# Altium PCB console_pcb.PcbDoc (part 2 of 2)
Units mil, origin at the board's own origin, x right, y up, seen from the top; angles counter-clockwise.
Board outline 3400 x 2600 mil, 2 copper layers (Top Layer, Bottom Layer); 190 components, 169 nets, 733 pads, 281 vias.
Unrouted connection lines stored in the file: 81.
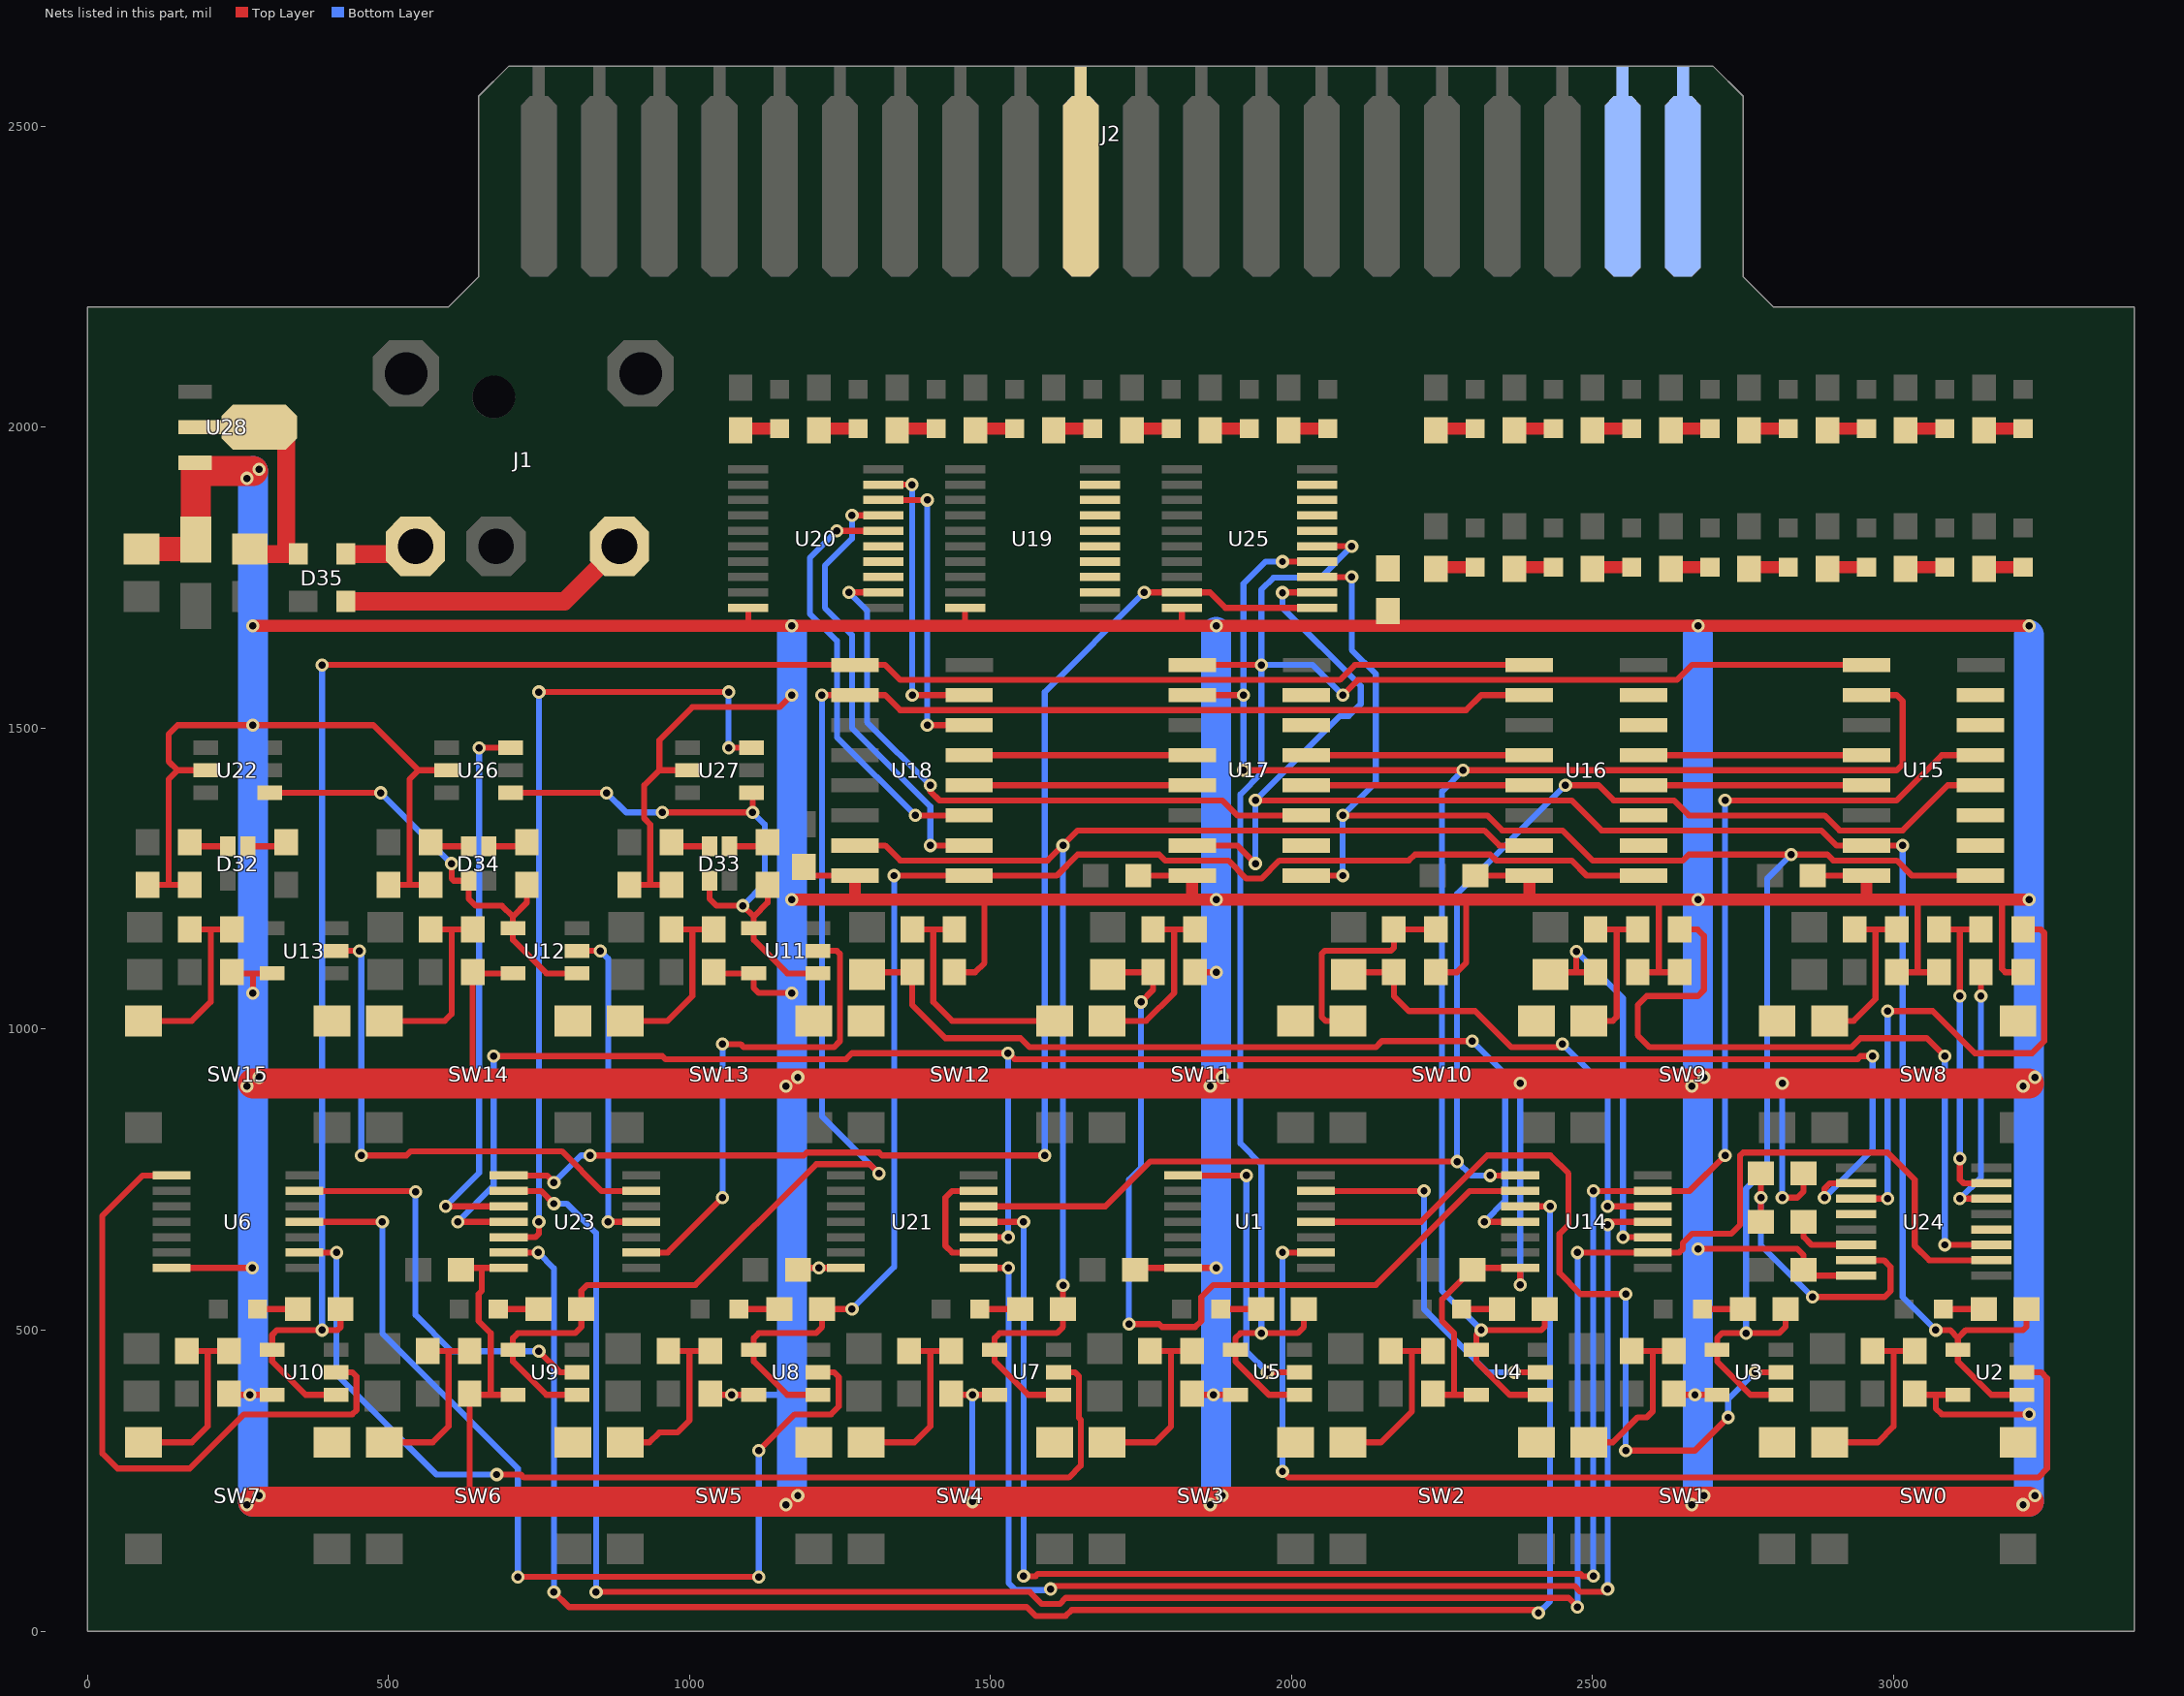
[diagram p2: the nets of this part, all layers, seen from the top]

## Via types
v1: diameter 22, hole 12, Top Layer to Bottom Layer, 281 vias

## Nets (pads, with @x,y where several pads share a name; then routed paths per layer and width w, separated by ;. In a path a pad name is that pad's centre, name@x,y a point inside that pad or via, vN(x,y) a via of type N, cw(c..) or ccw(c..) an arc to the next point about the centre after c; other vN are vias at no path point) (continued)
NetC13_2: C13.2 R37.2 U14.3 | length 656.9
  Top Layer w10: C13.2@2438.94,1094.57 2473,1094.57 ; v1(2473,1129) 2473,1094.57 ; R37.2@2505,1094.57 2473,1094.57 ; v1(2550.59,654.41) U14.3@2600.24,654.41
  Bottom Layer w10: v1(2473,1129) 2550.59,1051.41 v1(2550.59,654.41)
NetC14_2: C14.2 R38.2 U14.5 | length 807.6
  Top Layer w10: C14.2@2095,1094.57 R38.2@2170,1094.57 2170,1055 2195,1030 2305,1030 2365,970 2445,970 v1(2450,975) ; v1(2525,705.59) U14.5@2600.24,705.59
  Bottom Layer w10: v1(2450,975) 2525,900 v1(2525,705.59)
NetC15_2: C15.2 R39.2 U14.9 | length 1445.1
  Top Layer w10: C15.2@1695,1094.57 R39.2@1770,1094.57 1770,1065 v1(1750,1045) ; v1(1730,510) 1780,510 1785,505 1840,505 1850,515 1850,555 1870,575 2140,575 2296.18,731.18 U14.9@2379.76,731.18
  Bottom Layer w10: v1(1730,510) 1730,750 1750,770 v1(1750,1045)
NetC16_2: C16.2 R40.2 U14.11 | length 1489.7
  Top Layer w10: C16.2@1295,1094.57 R40.2@1370,1094.57 1370,1040 1425,985 1550,985 1565,970 2140,970 2150,980 v1(2300,980) ; v1(2320,680) U14.11@2379.76,680
  Bottom Layer w10: v1(2300,980) 2355,925 2355,715 v1(2320,680)
NetC17_1: C17.1 U24.14 | length 128.2
  Top Layer w10: C17.1@2850.43,690 2850.43,654.57 2863.39,641.61 U24.14@2937.8,641.61
NetC17_2: C17.2 R63.2 U24.15 | length 510.9
  Top Layer w10: C17.2@2779.57,690 v1(2779.57,720) R63.2@2779.57,760 ; v1(2865,555) 2985,555 2995,565 2995,605 2983.98,616.02 U24.15@2937.8,616.02
  Bottom Layer w10: v1@2779.57,715.43 v1(2779.57,720) 2779.57,640.43 v1(2865,555)
NetC18_1: C18.1 U24.6 | length 442.9
  Top Layer w10: v1(3110,718.39) U24.6@3162.2,718.39 ; v1(3145,1055) C18.1@3145,1094.57
  Bottom Layer w10: v1(3110,718.39) 3145,753.39 v1(3145,1055)
NetC18_2: C18.2 R64.2 U24.7 | length 540.1
  Top Layer w10: R64.2@3075,1165.43 C18.2@3145,1165.43 ; v1(3110,785) 3110,750 3116.02,743.98 U24.7@3162.2,743.98 ; v1(3110,1055) 3110,1165.43
  Bottom Layer w10: v1(3110,785) v1(3110,1055)
NetC19_1: C19.1 D35.4 U28.2 | length 378.4
  Top Layer w20: U28.2@187.01,2000 U28.2@285.43,2000
  Top Layer w30: C19.1@278,1789.37 D35.4@348,1789.37 ; 330,1790 U28.2@330,2000
NetD0_1: D0.1 R30.2 | length 67.1
  Top Layer w10: D0.1@3082.48,535 R30.2@3149.57,535
NetD1_1: D1.1 R29.2 | length 67.1
  Top Layer w10: D1.1@2682.48,535 R29.2@2749.57,535
NetD2_1: D2.1 R28.2 | length 67.1
  Top Layer w10: D2.1@2282.48,535 R28.2@2349.57,535
NetD3_1: D3.1 R27.2 | length 67.1
  Top Layer w10: D3.1@1882.48,535 R27.2@1949.57,535
NetD4_1: D4.1 R26.2 | length 67.1
  Top Layer w10: D4.1@1482.48,535 R26.2@1549.57,535
NetD5_1: D5.1 R25.2 | length 67.1
  Top Layer w10: D5.1@1082.48,535 R25.2@1149.57,535
NetD6_1: D6.1 R24.2 | length 67.1
  Top Layer w10: D6.1@682.48,535 R24.2@749.57,535
NetD7_1: D7.1 R23.2 | length 67.1
  Top Layer w10: D7.1@282.48,535 R23.2@349.57,535
NetD8_1: D8.1 R73.2 | length 62
  Top Layer w20: R73.2@3152.95,1767.52 D8.1@3215,1767.52
NetD9_1: D9.1 R71.2 | length 62
  Top Layer w20: R71.2@3022.95,1767.52 D9.1@3085,1767.52
NetD10_1: D10.1 R70.2 | length 62
  Top Layer w20: R70.2@2892.95,1767.52 D10.1@2955,1767.52
NetD11_1: D11.1 R69.2 | length 62
  Top Layer w20: R69.2@2762.95,1767.52 D11.1@2825,1767.52
NetD12_1: D12.1 R68.2 | length 62
  Top Layer w20: R68.2@2632.95,1767.52 D12.1@2695,1767.52
NetD13_1: D13.1 R67.2 | length 62
  Top Layer w20: R67.2@2502.95,1767.52 D13.1@2565,1767.52
NetD14_1: D14.1 R66.2 | length 62
  Top Layer w20: R66.2@2372.95,1767.52 D14.1@2435,1767.52
NetD15_1: D15.1 R65.2 | length 62
  Top Layer w20: R65.2@2242.95,1767.52 D15.1@2305,1767.52
NetD16_1: D16.1 R57.2 | length 62
  Top Layer w20: R57.2@3152.95,1997.52 D16.1@3215,1997.52
NetD17_1: D17.1 R55.2 | length 62
  Top Layer w20: R55.2@3022.95,1997.52 D17.1@3085,1997.52
NetD18_1: D18.1 R53.2 | length 62
  Top Layer w20: R53.2@2892.95,1997.52 D18.1@2955,1997.52
NetD19_1: D19.1 R51.2 | length 62
  Top Layer w20: R51.2@2762.95,1997.52 D19.1@2825,1997.52
NetD20_1: D20.1 R49.2 | length 62
  Top Layer w20: R49.2@2632.95,1997.52 D20.1@2695,1997.52
NetD21_1: D21.1 R47.2 | length 62
  Top Layer w20: R47.2@2502.95,1997.52 D21.1@2565,1997.52
NetD22_1: D22.1 R45.2 | length 62
  Top Layer w20: R45.2@2372.95,1997.52 D22.1@2435,1997.52
NetD23_1: D23.1 R43.2 | length 62
  Top Layer w20: R43.2@2242.95,1997.52 D23.1@2305,1997.52
NetD24_1: D24.1 R58.2 | length 62
  Top Layer w20: R58.2@1997.95,1997.52 D24.1@2060,1997.52
NetD25_1: D25.1 R56.2 | length 62
  Top Layer w20: R56.2@1867.95,1997.52 D25.1@1930,1997.52
NetD26_1: D26.1 R54.2 | length 62
  Top Layer w20: R54.2@1737.95,1997.52 D26.1@1800,1997.52
NetD27_1: D27.1 R52.2 | length 62
  Top Layer w20: R52.2@1607.95,1997.52 D27.1@1670,1997.52
NetD28_1: D28.1 R50.2 | length 62
  Top Layer w20: R50.2@1477.95,1997.52 D28.1@1540,1997.52
NetD29_1: D29.1 R48.2 | length 62
  Top Layer w20: R48.2@1347.95,1997.52 D29.1@1410,1997.52
NetD30_1: D30.1 R46.2 | length 62
  Top Layer w20: R46.2@1217.95,1997.52 D30.1@1280,1997.52
NetD31_1: D31.1 R44.2 | length 62
  Top Layer w20: R44.2@1087.95,1997.52 D31.1@1150,1997.52
NetD32_1: D32.1 R74.2 | length 56.4
  Top Layer w10: D32.1@266.73,1303.54 R74.2@323.11,1303.54
NetD32_2: D32.2 R75.2 | length 56.4
  Top Layer w10: R75.2@176.89,1303.54 D32.2@233.27,1303.54
NetD33_1: D33.1 R60.1 | length 56.4
  Top Layer w10: D33.1@1066.73,1303.54 R60.1@1123.11,1303.54
NetD33_2: D33.2 R59.1 | length 56.4
  Top Layer w10: R59.1@976.89,1303.54 D33.2@1033.27,1303.54
NetD34_1: D34.1 R42.2 | length 56.4
  Top Layer w10: D34.1@666.73,1303.54 R42.2@723.11,1303.54
NetD34_2: D34.2 R41.2 | length 56.4
  Top Layer w10: R41.2@576.89,1303.54 D34.2@633.27,1303.54
NetD35_2: D35.2 J1.2 | length 490.1
  Top Layer w30: D35.2@431.37,1710.63 792.32,1710.63 J1.2@883.66,1801.97
NetD35_3: D35.3 J1.1 | length 101.1
  Top Layer w30: D35.3@431.37,1789.37 J1.1@532.48,1789.37
NetJ2_11: J2.11 R76.2
NetR1_1: R1.1 R5.1 SW0.3 SW0.4 | length 312.9
  Top Layer w10: SW0.4@2893.5,313.58 2973.58,313.58 3000,340 3000,465.43 ; R5.1@2965,465.43 3000,465.43 ; R1.1@3035,465.43 3000,465.43
NetR2_1: R2.1 R6.1 SW1.3 SW1.4 | length 298.2
  Top Layer w10: SW1.4@2493.5,313.58 2533.58,313.58 2575,355 2590,355 2600,365 2600,465.43 ; R6.1@2565,465.43 2600,465.43 ; R2.1@2635,465.43 2600,465.43
NetR3_1: R3.1 R7.1 SW2.3 SW2.4 | length 298.2
  Top Layer w10: SW2.4@2093.5,313.58 2148.58,313.58 2200,365 2200,465.43 ; R7.1@2165,465.43 2200,465.43 ; R3.1@2235,465.43 2200,465.43
NetR4_1: R4.1 R8.1 SW3.3 SW3.4 | length 312.9
  Top Layer w10: SW3.4@1693.5,313.58 1773.58,313.58 1800,340 1800,465.43 ; R8.1@1765,465.43 1800,465.43 ; R4.1@1835,465.43 1800,465.43
NetR9_1: R9.1 R13.1 SW4.3 SW4.4 | length 312.9
  Top Layer w10: SW4.4@1293.5,313.58 1373.58,313.58 1400,340 1400,465.43 ; R13.1@1365,465.43 1400,465.43 ; R9.1@1435,465.43 1400,465.43
NetR10_1: R10.1 R14.1 SW5.3 SW5.4 | length 307
  Top Layer w10: SW5.4@893.5,313.58 933.58,313.58 950,330 980,330 1000,350 1000,465.43 ; R14.1@965,465.43 1000,465.43 ; R10.1@1035,465.43 1000,465.43
NetR11_1: R11.1 R15.1 SW6.3 SW6.4 | length 312.9
  Top Layer w10: SW6.4@493.5,313.58 573.58,313.58 600,340 600,465.43 ; R15.1@565,465.43 600,465.43 ; R11.1@635,465.43 600,465.43
NetR12_1: R12.1 R16.1 SW7.3 SW7.4 | length 312.9
  Top Layer w10: SW7.4@93.5,313.58 173.58,313.58 200,340 200,465.43 ; R16.1@165,465.43 200,465.43 ; R12.1@235,465.43 200,465.43
NetR17_1: R17.1 R20.1 SW13.3 SW13.4 | length 309.1
  Top Layer w10: SW13.4@893.5,1013.58 963.58,1013.58 1005,1055 1005,1165.43 ; R20.1@970,1165.43 1005,1165.43 ; R17.1@1040,1165.43 1005,1165.43
NetR18_1: R18.1 R21.1 SW14.3 SW14.4 | length 326.7
  Top Layer w10: SW14.4@493.5,1013.58 593.58,1013.58 605,1025 605,1165.43 ; R21.1@570,1165.43 605,1165.43 ; R18.1@640,1165.43 605,1165.43
NetR19_1: R19.1 R22.1 SW15.3 SW15.4 | length 314.9
  Top Layer w10: SW15.4@93.5,1013.58 173.58,1013.58 205,1045 205,1165.43 ; R22.1@170,1165.43 205,1165.43 ; R19.1@240,1165.43 205,1165.43
NetR31_1: R31.1 R36.1 SW8.3 SW8.4 | length 277
  Top Layer w10: SW8.4@2893.5,1013.58 2933.58,1013.58 2970,1050 2970,1165.43 ; R36.1@2935,1165.43 2970,1165.43 ; R31.1@3005,1165.43 2970,1165.43
NetR32_1: R32.1 R37.1 SW9.3 SW9.4 | length 274.6
  Top Layer w10: SW9.4@2493.5,1013.58 2533.58,1013.58 2540,1020 2540,1165.43 ; R37.1@2505,1165.43 2540,1165.43 ; R32.1@2585,1165.43 R32.1@2575,1165.43 2540,1165.43
NetR33_1: R33.1 R38.1 SW10.3 SW10.4 | length 375.7
  Top Layer w10: SW10.4@2093.5,1013.58 2056.42,1013.58 2050,1020 2050,1125 2055,1130 2165,1130 2170,1135 R38.1@2170,1165.43 R33.1@2240,1165.43
NetR34_1: R34.1 R39.1 SW11.3 SW11.4 | length 306.2
  Top Layer w10: SW11.4@1693.5,1013.58 1758.58,1013.58 1805,1060 1805,1165.43 ; R39.1@1770,1165.43 1805,1165.43 ; R34.1@1840,1165.43 1805,1165.43
NetR35_1: R35.1 R40.1 SW12.3 SW12.4 | length 404.9
  Top Layer w10: R40.1@1370,1165.43 1405,1165.43 ; R35.1@1440,1165.43 1405,1165.43 ; SW12.3@1606.5,1013.58 1436.42,1013.58 1405,1045 1405,1165.43
NetR61_2: R61.2 U24.3 | length 1232.2
  Top Layer w10: R61.2@2645,1165.43 2674.57,1165.43 2685,1155 2685,1065 2675,1055 2590,1055 2575,1040 2575,990 2595,970 2930,970 2945,985 3055,985 v1(3085,955) ; v1(3085,641.61) U24.3@3162.2,641.61
  Bottom Layer w10: v1(3085,641.61) v1(3085,955)
NetR62_1: R62.1 U24.11 | length 878.3
  Top Layer w10: U24.11@2937.8,718.39 v1(2990,718.39) ; v1(2990,1030) 3065,1030 3135,960 3230,960 3250,980 3250,1160 3244.57,1165.43 R62.1@3215,1165.43
  Bottom Layer w10: v1(2990,718.39) v1(2990,1030)
NetU1_2: U1.2 U2.2 | length 1895.4
  Top Layer w10: v1(1985,265) 1995,255 3240,255 3255,270 3255,420 3245,430 U2.2@3213.15,430 ; v1(1985,628.82) U1.2@2040.24,628.82
  Bottom Layer w10: v1(1985,265) v1(1985,628.82)
NetU1_4: U1.4 U3.2 | length 1363
  Top Layer w10: U1.4@2040.24,680 2215,680 2325,790 2430,790 2460,760 2460,675 2445,660 2445,595 2480,560 v1(2555,560) ; v1(2555,300) 2670,300 v1(2725,355) ; v1(2770,430) U3.2@2813.15,430
  Bottom Layer w10: v1(2555,300) v1(2555,560) ; v1(2725,355) 2725,385 v1(2770,430)
NetU1_6: U1.6 U4.2 | length 612.6
  Top Layer w10: U1.6@2040.24,731.18 v1(2220,731.18) ; v1(2370,430) U4.2@2413.15,430
  Bottom Layer w10: v1(2220,731.18) 2220,535 2325,430 v1(2370,430)
NetU1_8: U1.8 U5.2 | length 499.7
  Top Layer w10: U1.8@1819.76,756.77 v1(1925,756.77) ; v1(1960,430) U5.2@2013.15,430
  Bottom Layer w10: v1(1925,756.77) 1925,465 v1(1960,430)
NetU6_2: U6.2 U7.2 | length 1757.6
  Top Layer w10: U6.2@360.24,628.82 v1(413.82,628.82) ; v1(680,260) 720,260 725,255 1630,255 1650,275 1650,351 1647,354 1647,423 1640,430 U7.2@1613.15,430
  Bottom Layer w10: v1(413.82,628.82) 413.82,426.18 580,260 v1(680,260)
NetU6_4: U6.4 U8.2 | length 1673.4
  Top Layer w10: U6.4@360.24,680 v1(490,680) ; v1(715,90) v1(1115,90) ; v1(1115,300) 1175,360 1235,360 1248,373 1248,422 1240,430 U8.2@1213.15,430
  Bottom Layer w10: v1(490,680) 490,495 715,270 v1(715,90) ; v1(1115,90) v1(1115,300)
NetU6_6: U6.6 U9.2 | length 697.8
  Top Layer w10: U6.6@360.24,731.18 543.82,731.18 v1(545,730) ; v1(750,465) 785,430 U9.2@813.15,430
  Bottom Layer w10: v1(545,730) 545,525 605,465 v1(750,465)
NetU6_8: U6.8 U10.2 | length 1102.7
  Top Layer w10: U6.8@139.76,756.77 91.77,756.77 25,690 25,295 50,270 170,270 260,360 440,360 447,367 447,423 440,430 U10.2@413.15,430
NetU11_2: U11.2 U23.2 | length 812.7
  Top Layer w10: U23.2@920.24,628.82 963.82,628.82 v1(1055,720) ; v1(1055,975) 1085,975 1090,970 1240,970 1250,980 1250,1125 1245,1130 U11.2@1213.15,1130
  Bottom Layer w10: v1(1055,720) v1(1055,975)
NetU12_2: U12.2 U23.4 | length 549.5
  Top Layer w10: U12.2@813.15,1130 v1(852,1130) ; v1(865,680) U23.4@920.24,680
  Bottom Layer w10: v1(852,1130) 865,1117 v1(865,680)
NetU13_2: U13.2 U23.6 | length 874.2
  Top Layer w10: U13.2@413.15,1130 v1(452,1130) ; v1(455,790) 530,790 537,797 788,797 853.82,731.18 U23.6@920.24,731.18
  Bottom Layer w10: v1(455,790) v1@455,1130
NetU15_2: U15.2 U19.3
NetU15_3: U15.3 U19.2
NetU15_6: U15.6 U19.4
NetU15_7: U15.7 U19.5
NetU15_12: U15.12 U16.5 | length 370.5
  Top Layer w10: U16.5@2584.49,1455 U15.12@2955,1455
NetU15_13: U15.13 U16.4 | length 370.5
  Top Layer w10: U16.4@2584.49,1405 U15.13@2955,1405
NetU16_2: U16.2 U19.7
NetU16_3: U16.3 U19.6
NetU16_6: U16.6 U19.8
NetU16_7: U16.7 U19.9
NetU16_12: U16.12 U17.5 | length 370.5
  Top Layer w10: U17.5@2024.49,1455 U16.12@2395,1455
NetU16_13: U16.13 U17.4 | length 370.5
  Top Layer w10: U17.4@2024.49,1405 U16.13@2395,1405
NetU17_2: U17.2 U20.3
NetU17_3: U17.3 U20.2 | length 1084.6
  Top Layer w10: v1(1265,1725.43) U20.2@1322.2,1725.43 ; v1(1400,1405) 1400,1395 1415,1380 1885,1380 1910,1355 U17.3@2024.49,1355
  Bottom Layer w10: v1(1265,1725.43) 1295,1695.43 1295,1510 v1(1400,1405)
NetU17_6: U17.6 U20.4
NetU17_7: U17.7 U20.5
NetU17_12: U17.12 U18.5 | length 370.5
  Top Layer w10: U18.5@1464.49,1455 U17.12@1835,1455
NetU17_13: U17.13 U18.4 | length 370.5
  Top Layer w10: U18.4@1464.49,1405 U17.13@1835,1405
NetU18_2: U18.2 U20.7 | length 756.2
  Top Layer w10: v1(1270,1853.39) U20.7@1322.2,1853.39 ; v1(1400,1305) U18.2@1464.49,1305
  Bottom Layer w10: v1(1270,1853.39) 1270,1815 1225,1770 1225,1700 1270,1655 1270,1500 1400,1370 v1(1400,1305)
NetU18_3: U18.3 U20.6 | length 730.6
  Top Layer w10: v1(1245,1827.8) U20.6@1322.2,1827.8 ; v1(1375,1355) U18.3@1464.49,1355
  Bottom Layer w10: v1(1245,1827.8) 1200,1782.8 1200,1690 1245,1645 1245,1485 v1(1375,1355)
NetU18_6: U18.6 U20.8 | length 516.3
  Top Layer w10: U20.8@1322.2,1878.98 v1(1395,1878.98) ; v1(1395,1505) U18.6@1464.49,1505
  Bottom Layer w10: v1(1395,1505) v1(1395,1878.98)
NetU18_7: U18.7 U20.9 | length 492.5
  Top Layer w10: U20.9@1322.2,1904.57 v1(1369.57,1904.57) ; v1(1370,1555) U18.7@1464.49,1555
  Bottom Layer w10: v1(1369.57,1904.57) 1370,1905 v1(1370,1555)
NetU21_2: U21.2 U21.6 | length 199.7
  Top Layer w10: U21.2@1480.24,628.82 1436.18,628.82 1425,640 1425,720 1436.18,731.18 U21.6@1480.24,731.18
NetU21_3: U21.3 U23.11 U24.10 | length 3381.7
  Top Layer w10: v1(615,680) U23.11@699.76,680 ; v1(675,955) 955,955 960,950 1260,950 1270,960 v1(1528.82,960) 1530,960 1540,950 2940,950 2945,955 v1(2965,955) ; U21.3@1480.24,654.41 v1(1529.41,654.41) ; v1(2885,720) 2885,735 2893.98,743.98 U24.10@2937.8,743.98
  Bottom Layer w10: v1(615,680) 675,740 v1(675,955) ; v1(1528.82,960) 1529.41,959.41 v1(1529.41,654.41) ; v1(2885,720) 2965,800 v1(2965,955)
NetU23_8: U23.8 U25.1 U25.19 | length 2219.2
  Top Layer w10: U23.8@699.76,756.77 763.23,756.77 v1(775,745) ; v1(835,790) 1190,790 1195,795 1315,795 1320,790 v1(1590,790) ; v1(1755.43,1725.43) U25.19@1817.8,1725.43 1864.57,1725.43 1890.16,1699.84 U25.1@2042.2,1699.84
  Bottom Layer w10: v1(775,745) 820,790 v1(835,790) ; v1(1590,790) 1590,1560 v1(1755.43,1725.43)
NetU23_10: U23.10 U26.3 | length 941.4
  Top Layer w10: v1(595,705.59) U23.10@699.76,705.59 ; v1@651,1467.4 U26.3@703.15,1467.4
  Bottom Layer w10: v1(595,705.59) 650.59,761.18 v1(650.59,1467)
NetU23_12: U23.12 U27.3 | length 1398.3
  Top Layer w10: U23.12@699.76,654.41 744.41,654.41 750,660 v1(750,680) ; v1(750,1560) v1(1065,1560) ; v1(1065,1467.4) U27.3@1103.15,1467.4
  Bottom Layer w10: v1(750,680) v1(750,1560) ; v1(1065,1467.4) v1(1065,1560)
R\D\: J2.40 U24.12
SW_0: R30.1 U2.1 U2.4 U15.15 U17.15 U25.2 | length 3054.9
  Top Layer w10: U17.15@1835,1305 1910,1305 v1(1940,1275) ; v1(1940,1380) 2465,1380 2515,1330 2880,1330 2905,1305 U15.15@2955,1305 v1(3015,1305) ; v1(1985,1725) 1985.43,1725.43 U25.2@2042.2,1725.43 ; v1(3070,500) 3093.7,500 3106.85,486.85 ; U2.1@3213.15,392.6 3162.4,392.6 3106.85,448.15 3106.85,486.85 ; R30.1@3220.43,535 3220.43,505.43 3215,500 3120,500 3106.85,486.85
  Bottom Layer w10: v1(1940,1275) v1(1940,1380) 2080,1520 2095,1520 2115,1540 2115,1570 1985,1700 v1(1985,1725) ; v1(3015,1305) 3015,555 v1(3070,500)
SW_1: R29.1 U3.1 U3.4 U15.1 U17.1 U25.3 | length 2907.8
  Top Layer w10: U17.1@2024.49,1255 v1(2085,1255) ; U25.3@2042.2,1751.02 v1(2100,1751.02) ; v1(2085,1355) 2325,1355 2350,1330 2450,1330 2500,1280 2650,1280 2660,1290 2890,1290 2900,1280 3005,1280 3030,1255 U15.1@3144.49,1255 ; U3.1@2813.15,392.6 2762.4,392.6 2706.85,448.15 2706.85,486.85 2715,495 v1(2755,495) 2810,495 2820.43,505.43 R29.1@2820.43,535
  Bottom Layer w10: v1(2085,1255) v1(2085,1355) 2140,1410 2140,1590 2100,1630 v1(2100,1751.02) ; v1(2755,495) 2755,735 2790,770 2790,1250 v1(2830,1290)
SW_2: R28.1 U4.1 U4.4 U15.10 U17.10 U25.4 | length 3098.9
  Top Layer w10: U17.10@1835,1555 v1@1925,1555 ; v1(1920,1430) v1(2285,1430) 3005,1430 3015,1440 3015,1545 3005,1555 U15.10@2955,1555 ; v1(1985,1776.61) U25.4@2042.2,1776.61 ; U4.1@2413.15,392.6 2362.4,392.6 2306.85,448.15 2306.85,491.85 v1(2315,500) 2415,500 2420.43,505.43 R28.1@2420.43,535
  Bottom Layer w10: v1(1920,1430) v1(1920,1555) 1920,1740 1956.61,1776.61 v1(1985,1776.61) ; v1(2285,1430) 2250,1395 2250,565 v1(2315,500)
SW_3: R27.1 U5.1 U5.4 U15.9 U17.9 U25.5 | length 2982
  Top Layer w10: U17.9@1835,1605 v1(1950,1605) ; U5.1@2013.15,392.6 1962.4,392.6 1906.85,448.15 1906.85,486.85 1915,495 v1(1950,495) 2010,495 2020.43,505.43 R27.1@2020.43,535 ; U25.5@2042.2,1802.2 v1(2100,1802.2) ; v1(2085,1555) 2110,1580 2640,1580 2665,1605 U15.9@2955,1605
  Bottom Layer w10: v1(1950,495) 1950,775 1915,810 1915,1390 1950,1425 v1(1950,1605) ; v1(2085,1555) 2035,1605 v1(1950,1605) ; v1(2100,1802.2) 2047.8,1750 1970,1750 1950,1730 v1(1950,1605)
SW_4: R26.1 U7.1 U7.4 U16.15 U18.15 U25.6 | length 2250.3
  Top Layer w10: U18.15@1275,1305 1325,1305 1350,1280 1595,1280 1645,1330 2320,1330 2345,1305 U16.15@2395,1305 ; U7.1@1613.15,392.6 1562.4,392.6 1506.85,448.15 1506.85,486.85 1515,495 1610,495 1620.43,505.43 R26.1@1620.43,535 v1(1620.43,574.57)
  Bottom Layer w10: v1(1620.43,574.57) v1(1620.43,1305)
SW_5: R25.1 U8.1 U8.4 U16.1 U18.1 U25.7 | length 2424
  Top Layer w10: U8.1@1213.15,392.6 1162.4,392.6 1106.85,448.15 1106.85,486.85 1115,495 1210,495 1220.43,505.43 R25.1@1220.43,535 v1(1270,535) ; v1(1340,1255) U18.1@1464.49,1255 1610,1255 1645,1290 1780,1290 1790,1280 1895,1280 1925,1250 1950,1250 1980,1280 2195,1280 2205,1290 2330,1290 2340,1280 2465,1280 2490,1255 U16.1@2584.49,1255
  Bottom Layer w10: v1(1270,535) 1340,605 v1(1340,1255)
SW_6: R24.1 U9.1 U9.4 U16.10 U18.10 U25.8 | length 2967.5
  Top Layer w10: U9.1@813.15,392.6 762.4,392.6 706.85,448.15 706.85,486.85 715,495 810,495 820.43,505.43 R24.1@820.43,535 820.43,565.43 830,575 1010,575 1210.66,775.66 1299.34,775.66 v1(1315,760) ; v1(1220,1555) U18.10@1275,1555 1325,1555 1350,1530 2290,1530 2315,1555 U16.10@2395,1555
  Bottom Layer w10: v1(1220,1555) 1220,855 v1(1315,760)
SW_7: R23.1 U10.1 U10.4 U16.9 U18.9 U25.9 | length 3453
  Top Layer w10: v1(390,1605) U18.9@1275,1605 1325,1605 1350,1580 2080,1580 2105,1605 U16.9@2395,1605 ; U10.1@413.15,392.6 362.4,392.6 306.85,448.15 306.85,491.85 315,500 v1(390,500) 415.79,500 420.43,504.65 R23.1@420.43,535
  Bottom Layer w10: v1(390,500) v1(390,1605)
SW_AD_LD: U14.10 U23.13 | length 3014.8
  Top Layer w10: U23.13@699.76,628.82 v1(748.82,628.82) ; v1(775,65) 800,40 1560,40 1575,25 1625,25 1635,35 2405,35 v1(2410,30) ; U14.10@2379.76,705.59 v1(2429.41,705.59)
  Bottom Layer w10: v1(748.82,628.82) 775,602.64 v1(775,65) ; v1(2410,30) 2429.41,49.41 v1(2429.41,705.59)
SW_AD_LH: D33.4 R60.2 U11.1 U11.4 U26.1 U27.1 | length 970.5
  Top Layer w10: U26.1@703.15,1392.6 v1@862.6,1392.6 ; v1(955,1360) v1(1105,1360) U27.1@1105,1390.75 ; D33.4@1033.27,1246.46 1033.27,1216.73 1045,1205 v1(1088.7,1205) 1106.85,1186.85 ; R60.2@1130,1239.57 1130,1210 1106.85,1186.85 ; U11.1@1213.15,1092.6 1162.4,1092.6 1106.85,1148.15 1106.85,1186.85
  Bottom Layer w10: v1(862.5,1392.5) 895,1360 v1(955,1360) ; v1(1088.7,1205) 1125,1241.3 1125,1340 v1(1105,1360)
SW_DEC: U14.8 U15.4 U21.5 | length 2391.1
  Top Layer w10: U21.5@1480.24,705.59 1690.59,705.59 1765,780 v1(2275,780) ; v1(2330,756.77) U14.8@2379.76,756.77 ; v1(2455,1405) 2510,1405 2535,1380 2635,1380 2660,1355 2885,1355 2910,1330 3015,1330 3090,1405 U15.4@3144.49,1405
  Bottom Layer w10: v1(2330,756.77) 2298.23,756.77 v1(2275,780) 2275,1225 v1(2455,1405)
SW_DEPOSIT: U14.2 U23.9 U24.2 | length 3975.7
  Top Layer w10: U23.9@699.76,731.18 753.82,731.18 v1(775,710) ; v1(845,65) 1565,65 1585,45 1615,45 1625,55 2460,55 v1(2475,40) ; v1(2475,628.82) U14.2@2600.24,628.82 2643.82,628.82 2650,635 2650,645 2665,660 2730,660 2745,675 2745,790 2750,795 2990,795 3035,750 3035,640 3058.98,616.02 U24.2@3162.2,616.02
  Bottom Layer w10: v1(775,710) 796.18,710 845,661.18 v1(845,65) ; v1(2475,40) v1(2475,628.82)
SW_EXAMINE: U14.4 U21.1 | length 2257.2
  Top Layer w10: U21.1@1480.24,603.23 v1(1530,603.23) ; v1(1600,70) 1605,75 2470,75 2480,65 2520,65 v1(2525,70) ; v1@2530,680 U14.4@2600.24,680
  Bottom Layer w10: v1(1530,603.23) 1530,80 1541.82,68.18 1598.18,68.18 v1(1600,70) ; v1(2525,70) v1(2525,675)
SW_INC: U14.6 U15.5 U21.4 | length 3541.7
  Top Layer w10: U21.4@1480.24,680 v1(1555,680) ; v1(1555,91.18) 1575,91.18 1578.82,95 2480,95 2483.82,91.18 v1(2501.18,91.18) ; v1(2501.18,731.18) U14.6@2600.24,731.18 2661.18,731.18 v1(2720,790) ; v1(2720,1380) 3005,1380 3080,1455 U15.5@3144.49,1455
  Bottom Layer w10: v1(1555,91.18) v1(1555,680) ; v1(2501.18,91.18) v1(2501.18,731.18) ; v1(2720,790) v1(2720,1380)
SW_MEM_IO: D34.4 R42.1 U12.1 U12.4 U22.1 | length 751.3
  Top Layer w10: U22.1@303.15,1392.6 v1(487.4,1392.6) ; v1(605,1275) 605,1250 608.54,1246.46 D34.4@633.27,1246.46 633.27,1216.73 645,1205 688.7,1205 706.85,1186.85 ; R42.1@730,1239.57 730,1210 706.85,1186.85 ; U12.1@813.15,1092.6 762.4,1092.6 706.85,1148.15 706.85,1167.4 706.85,1186.85
  Bottom Layer w10: v1(487.4,1392.6) v1(605,1275)
VCC: C20.2 C21.2 C22.2 C23.2 C24.2 C25.2 C26.2 C27.2 C28.2 C29.2 C30.2 C31.1 C32.1 R1.2 R2.2 R3.2 R4.2 R9.2 R10.2 R11.2 R12.2 R17.2 R18.2 R19.2 R31.2 R32.2 R33.2 R34.2 R35.2 R41.1 R59.2 R61.1 R62.2 R63.1 R64.1 R72.1 R75.1 R76.1 U1.14 U2.5 U3.5 U4.5 U5.5 U6.14 U7.5 U8.5 U9.5 U10.5 U11.5 U12.5 U13.5 U14.14 U15.16 U16.16 U17.16 U18.16 U19.20 U20.20 U21.14 U22.5 U23.14 U24.16 U25.20 U26.5 U27.5 U28.3 | length 26366.1
  Top Layer w10: C30.2@100,1239.57 R75.1@170,1239.57 ; 135,1239.57 135,1415 150,1430 ; U6.14@139.76,603.23 v1(273.77,603.23) ; U22.5@196.85,1430 150,1430 ; R12.2@236.97,392.6 U10.5@306.85,392.6 ; R19.2@241.97,1092.6 275,1092.6 ; v1(275,1060) 275,1092.6 ; U13.5@306.85,1092.6 275,1092.6 ; R72.1@500,1239.57 R41.1@570,1239.57 ; 535,1239.57 535,1415 550,1430 ; U26.5@596.85,1430 550,1430 ; C24.2@623.66,603.23 U23.14@699.76,603.23 ; 635,215 R11.2@635,394.57 ; R11.2@636.97,392.6 U9.5@706.85,392.6 ; 640,910 R18.2@640,1094.57 ; R18.2@641.97,1092.6 U12.5@706.85,1092.6 ; 655,603.23 655,565 650,560 650,515 670,495 670,392.6 ; C29.2@900,1239.57 R59.2@970,1239.57 ; 935,1239.57 935,1340 925,1350 925,1405 950,1430 ; U27.5@996.85,1430 950,1430 ; R10.2@1036.97,392.6 U8.5@1106.85,392.6 ; R17.2@1041.97,1092.6 1106.85,1092.6 1106.85,1068.15 1115,1060 v1(1170,1060) ; 1097.8,1670.2 U20.20@1097.8,1699.84 ; v1(1170,1555) 1150,1535 1005,1535 950,1480 950,1430 ; C23.2@1183.66,603.23 U21.14@1259.76,603.23 ; C28.2@1204.57,1255 U18.16@1275,1255 ; R9.2@1436.97,392.6 v1(1470,392.6) U7.5@1506.85,392.6 ; R35.2@1440,1094.57 1474.57,1094.57 1490,1110 1490,1215 ; 1457.8,1670.2 U19.20@1457.8,1699.84 ; C22.2@1743.66,603.23 U1.14@1819.76,603.23 v1(1874.81,603.23) ; C27.2@1745.43,1255 U17.16@1835,1255 ; 1817.8,1670.2 U25.20@1817.8,1699.84 ; R4.2@1836.97,392.6 U5.5@1906.85,392.6 ; R34.2@1840,1094.57 v1(1874.96,1094.57) ; R3.2@2236.97,392.6 2270,392.6 ; R33.2@2240,1094.57 2274.57,1094.57 2290,1110 2290,1215 ; C21.2@2300.43,600 2299.01,600 2250,550.99 2250,515 2270,495 2270,392.6 ; C21.2@2303.66,603.23 U14.14@2379.76,603.23 v1(2379.76,575.24) ; C26.2@2305.43,1255 U16.16@2395,1255 ; U4.5@2306.85,392.6 2270,392.6 ; R32.2@2575,1094.57 2610,1094.57 ; 2610,1215 2610,1094.57 ; R2.2@2636.97,392.6 U3.5@2706.85,392.6 ; R61.1@2645,1094.57 2610,1094.57 ; v1(2675.09,635) 2840,635 2850.43,624.57 C20.2@2850.43,600 ; v1(2815,720) 2840,720 2850.43,730.43 R63.1@2850.43,760 ; C20.2@2850,590.43 U24.16@2937.8,590.43 ; C25.2@2865.43,1255 U15.16@2955,1255 ; R31.2@3005,1094.57 3040,1094.57 ; R1.2@3036.97,392.6 3070,392.6 ; 3040,1215 3040,1094.57 ; R64.1@3075,1094.57 3040,1094.57 ; U2.5@3106.85,392.6 3070,392.6 ; 3180,1215 3180,1100 3185.43,1094.57 R62.2@3215,1094.57 ; v1(3225,360) 3080,360 3070,370 3070,392.6 ; 150,1430 135,1445 135,1490 150,1505 475,1505 550,1430
  Top Layer w20: v1(275,1670) v1(1170,1670) ; v1(1170,1215) v1(3225,1215) ; 1275,1215 U18.16@1275,1255 ; 1835,1215 U17.16@1835,1255 ; v1(1875,1670) v1(1170,1670) ; 2395,1215 U16.16@2395,1255 ; 2955,1215 U15.16@2955,1255 ; v1(3225,1670) v1(1170,1670)
  Top Layer w40: C31.1@90,1797.37 C32.1@180,1797.37
  Top Layer w50: C32.1@180,1813.12 180,1927 v1@275,1927 ; 275,215 3225,215 ; 275,910 3225,910
  Bottom Layer w10: v1(1070,392.6) 1170,392.6 ; 1170.23,603.23 v1(1215,603.23) ; v1(1470,215) v1(1470,392.6) ; v1(2379.76,575.24) 2379.76,909.76 v1(2380,910) ; v1(2815,720) v1(2815,910)
  Bottom Layer w50: 275,215 v1@275,1927 ; 1170,215 1170,1656 ; 1875,215 v1@1875,1660 ; v1(1874.96,1094.57) v1(1875,1215) ; 2675,215 2675,1655 ; 3225,215 3225,1655
  other v1: 265,210 1160,210 1865,210 2665,210 3215,210 285,225 1180,225 1885,225 2685,225 3235,225 270,392.6 1870,392.6 2670,392.6 265,905 1160,905 1865,905 2665,905 3215,905 285,920 1180,920 1885,920 2685,920 3235,920 2675,1215 275,1505 2675,1670 265,1915 285,1930
W\R\: J2.39 U24.4
pads on no net: J1.3 J1.6 J2.6 J2.16 J2.17 J2.18 J2.33 J2.34 J2.35 J2.37 U1.10 U1.12 U6.10 U6.12 U14.12 U18.12 U18.13 U21.8 U21.11 U24.5 U24.13

## Silkscreen, mask and mechanical layers (free items; w line width, h text height)
Board Outline:
  lines w7.87: -400,100 -400,2100 -350,2150 -50,2150 0,2200 3350,2200 3350,0 0,0 -50,50 -350,50 -400,100

## Text inside footprints (layer, text, board x,y; h text height)
J2: Top Overlay "20" at 725,2145 h48 r270; Top Overlay "1" at 2625,2210 h48 r270; Bottom Overlay "40" at 2625,2225 h48 r270; Bottom Overlay "21" at 725,2220 h48 r270